# Altium PCB Hope Badge.PcbDoc
Units mm, origin at the board's own origin, x right, y up, seen from the top; angles counter-clockwise.
Board outline 52.39 x 36.16 mm, 2 copper layers (Top Layer, Bottom Layer); 17 components, 9 nets, 34 pads, 6 vias.
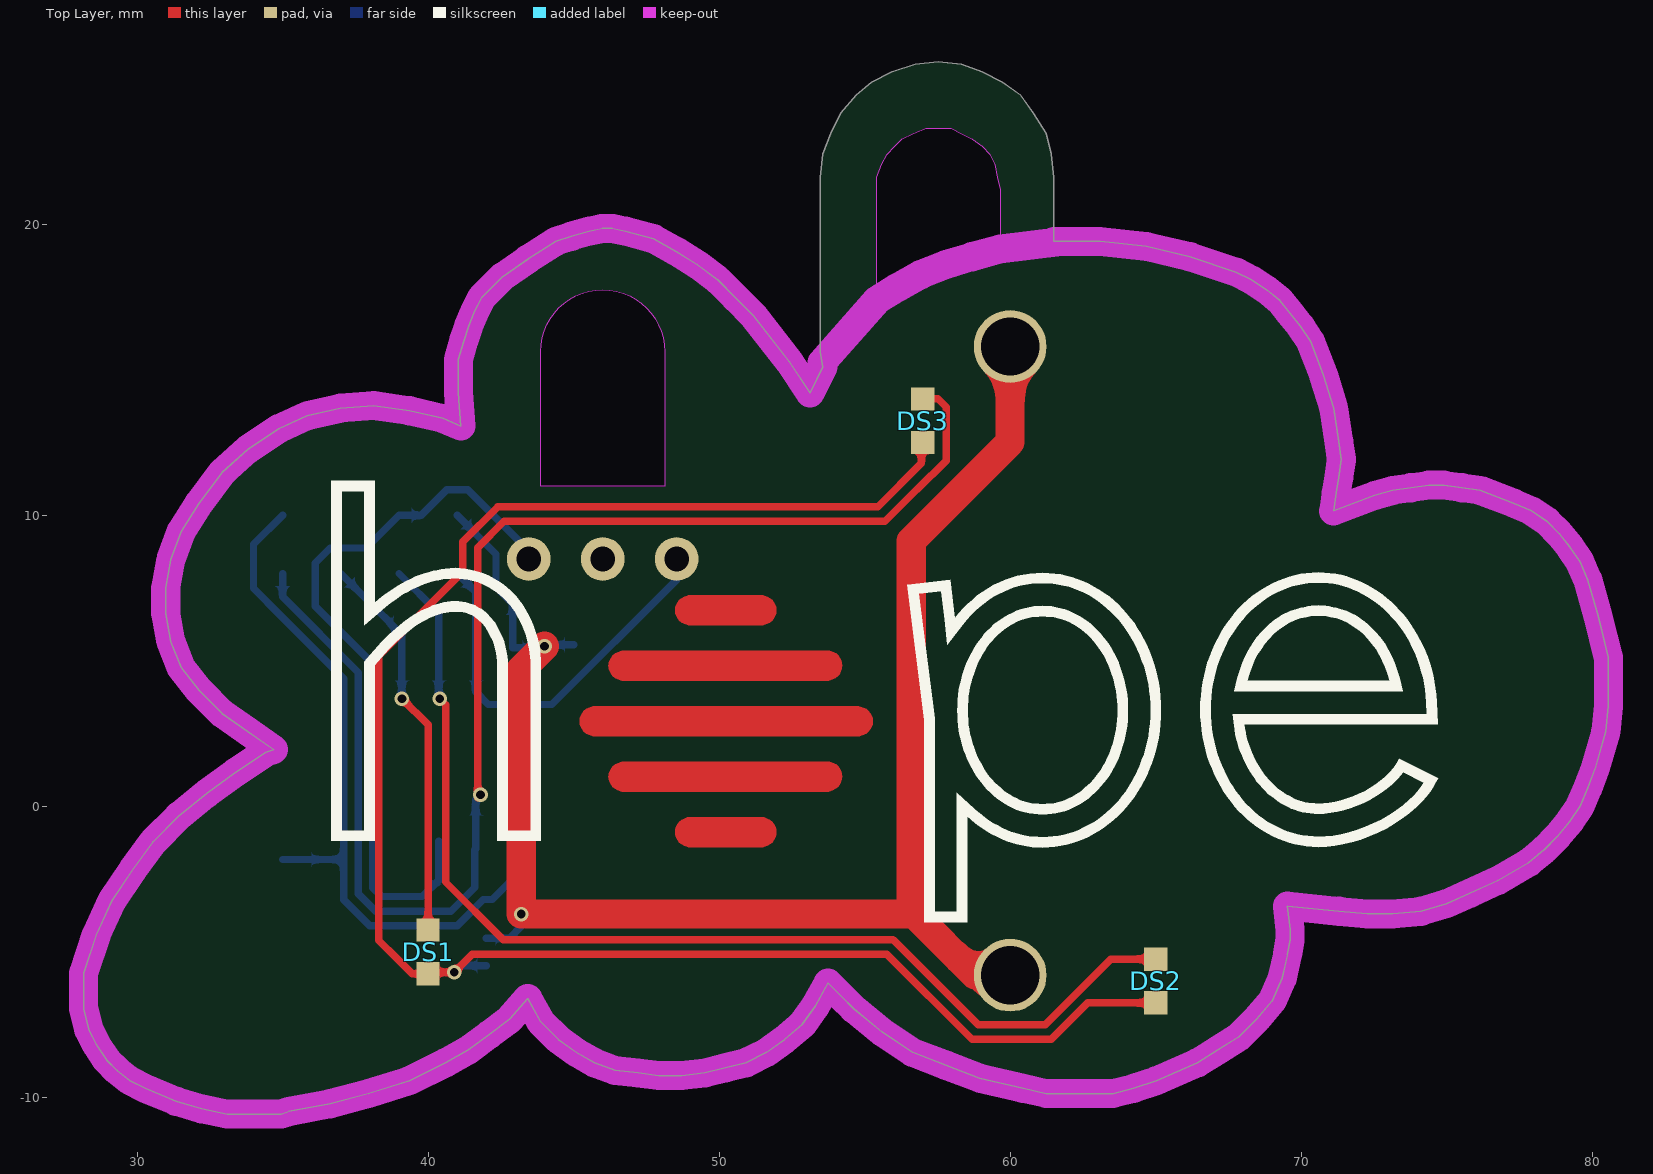
[diagram p0: Top Layer view]
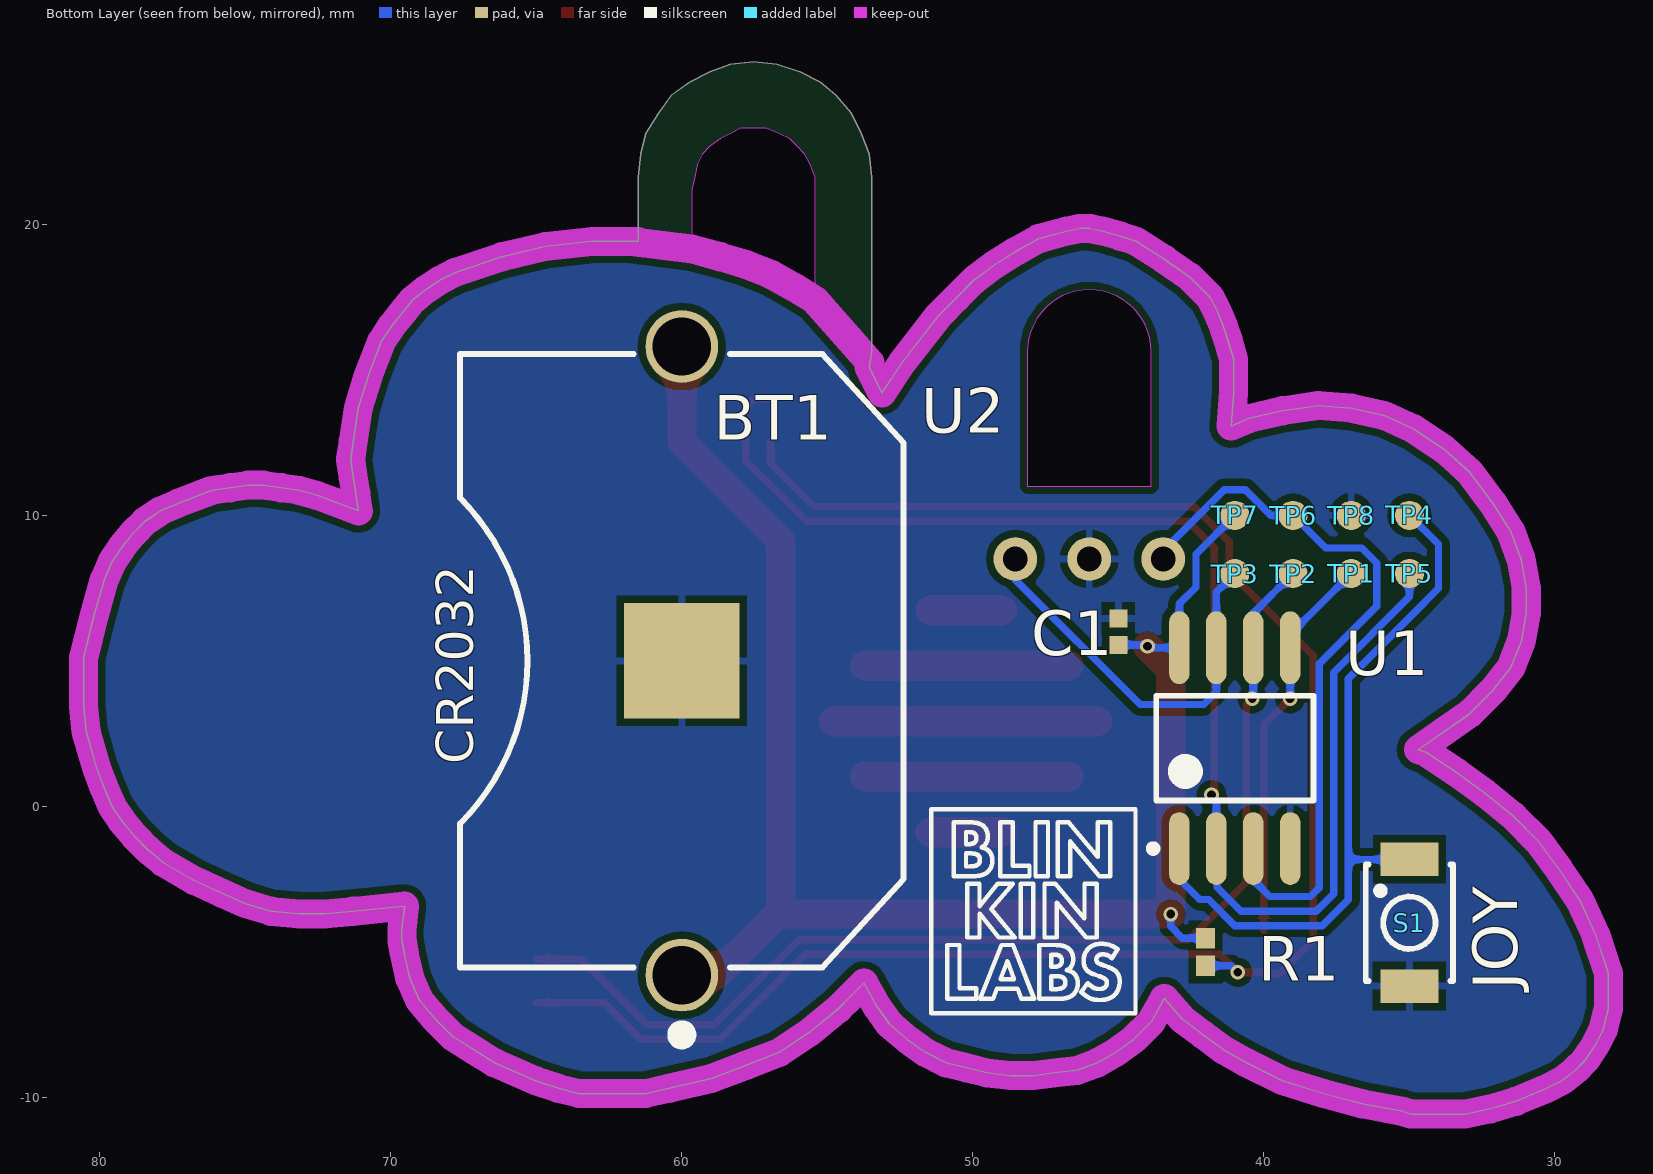
[diagram p1: Bottom Layer view, seen from below]

## Layer stack, top to bottom
Top Solder: solder mask 0.0102, Solder Resist, Dk 3.5
Top Layer: signal copper 0.0356
Dielectric 1: dielectric 0.32, FR-4, Dk 4.8
Bottom Layer: signal copper 0.0356
Bottom Solder: solder mask 0.0102, Solder Resist, Dk 3.5

## Board outline
29.312,-9.072 28.959,-8.72 28.606,-8.191 28.342,-7.661 28.165,-6.956 28.165,-5.721 28.606,-4.398 29.135,-3.252 29.841,-2.193 30.547,-1.223 31.428,-0.341 32.399,0.453 33.369,1.158 34.427,1.864 34.692,1.952 33.81,2.569 32.928,3.187 32.134,3.98 31.517,4.774 31.164,5.656 30.987,6.626 30.987,7.508 31.164,8.478 31.517,9.448 32.134,10.418 32.928,11.477 33.81,12.271 34.868,12.976 35.838,13.417 36.985,13.682 38.131,13.77 39.366,13.593 40.512,13.329 41.13,13.064 41.042,14.211 41.042,15.357 41.218,15.975 41.394,16.504 41.571,16.945 41.835,17.474 42.188,17.827 42.541,18.18 43.423,18.797 44.393,19.414 44.922,19.591 45.54,19.767 45.981,19.855 46.333,19.855 46.774,19.767 47.744,19.503 48.538,19.062 49.244,18.621 49.949,18.091 50.567,17.474 51.184,16.857 52.419,15.269 53.124,14.211 53.565,15.093 53.477,15.622 53.477,21.619 53.565,22.413 53.83,23.118 54.183,23.824 54.712,24.441 55.241,24.882 55.947,25.235 56.74,25.5 57.534,25.588 58.328,25.5 59.033,25.235 59.739,24.882 60.356,24.441 60.797,23.824 61.238,23.118 61.415,22.413 61.503,21.619 61.503,19.414 63.09,19.414 64.678,19.238 66.177,18.885 67.765,18.356 68.294,18.091 68.823,17.739 69.264,17.386 69.617,16.945 69.969,16.504 70.322,15.975 70.763,14.828 71.116,13.682 71.292,12.535 71.381,11.918 71.292,11.3 71.204,10.771 71.116,10.154 72.527,10.683 73.144,10.859 73.762,10.948 74.379,11.036 74.908,11.036 75.526,10.948 76.143,10.859 77.29,10.418 77.907,10.154 78.436,9.801 78.877,9.36 79.23,8.919 79.583,8.39 79.847,7.773 80.2,6.538 80.553,5.127 80.553,3.451 80.465,2.569 80.112,1.334 79.847,0.629 79.583,0.012 79.23,-0.518 78.789,-1.047 78.348,-1.488 77.819,-1.929 76.76,-2.546 75.79,-2.987 74.997,-3.34 74.115,-3.604 73.144,-3.693 72.262,-3.693 71.292,-3.604 69.528,-3.428 69.617,-4.222 69.617,-4.575 69.528,-5.104 69.352,-5.897 68.999,-6.691 68.47,-7.309 67.853,-7.926 67.147,-8.367 66.442,-8.808 65.031,-9.425 64.237,-9.69 63.531,-9.866 61.238,-9.866 60.444,-9.69 58.945,-9.337 57.799,-8.896 56.652,-8.455 55.594,-7.75 54.624,-6.956 54.183,-6.515 53.742,-6.074 53.301,-6.868 52.86,-7.485 52.242,-8.014 51.625,-8.455 50.919,-8.808 50.214,-8.984 49.508,-9.161 48.715,-9.249 47.921,-9.249 47.215,-9.161 46.422,-9.072 45.716,-8.808 45.099,-8.455 44.481,-8.014 43.864,-7.397 43.423,-6.603 42.806,-7.309 42.1,-7.838 41.394,-8.367 40.601,-8.808 39.366,-9.425 37.955,-9.866 36.632,-10.219 35.221,-10.484 34.956,-10.572 33.104,-10.572 32.222,-10.395 31.34,-10.131 30.282,-9.69 29.753,-9.425
cut-out: 55.417,17.386 55.417,21.619 55.594,22.06 55.77,22.413 56.035,22.678 56.299,22.942 56.652,23.118 57.093,23.295 57.975,23.295 58.328,23.118 58.681,22.942 59.033,22.678 59.298,22.413 59.474,22.06 59.562,21.619 59.651,21.178 59.651,19.15 58.681,18.885 57.799,18.621 56.917,18.268 56.123,17.827

## Design rules (kind name [scope] priority, off if disabled: settings)
Clearance [All] p1: gap=0.25 ignorepadtopadclearanceinfootprint=FALSE
PolygonConnect [All] p1: connectstyle=Relief reliefconductorwidth=0.254 reliefentries=4 polygonreliefangle="90 Angle" airgapwidth=0.254
RoutingVias [All] p1: holewidth=0.3 width=0.5 viastyle="Through Hole" minholewidth=0.3 minwidth=0.5 maxholewidth=0.711 maxwidth=1.27
SilkToSolderMaskClearance [IsPad] p1: minsilkscreentomaskgap=0.25 clearancetoexposedcopper=TRUE
SolderMaskExpansion SolderMaskExpansion_Vias [IsVia] p1: expansion=-9
SolderMaskExpansion [All] p2: expansion=0.102
Width [All] p1: maxlimit=1 minlimit=0.254 preferedwidth=0.254 minimp=50.000000 maximp=50.000000 favimp=50.000000
29 further rules are at their usual default settings.

## Components (designator, comment, footprint, x,y, rotation, side; value= is the part's Value field where it differs from the comment)
BT1 "BK-913-TR" MPD-BK-913-3_V 60,5 r90 bottom locked
C1 "CAP 100nF 6.3V 0402(1005)" CAPC0402(1005)60_N 45,6 r270 bottom value=100nF
DS1 "LTW-C191TS5" LTST-LTW-C191TS5_V 40,-5 r90 top
DS2 "LTW-C191TS5" LTST-LTW-C191TS5_V 65,-6 r90 top
DS3 "LTW-C191TS5" LTST-LTW-C191TS5_V 57,13.25 r90 top
R1 "RC0402JR-0775RL" RESC1005X40X25ML5T10 42,-5 r90 bottom
S1 "JOY" TS-1185 35,-4 r270 bottom
TP1 "TP-SM-C-100" TP-SM-C-100 37,8 r180 bottom
TP2 "TP-SM-C-100" TP-SM-C-100 39,8 r90 bottom
TP3 "TP-SM-C-100" TP-SM-C-100 41,8 r90 bottom
TP4 "TP-SM-C-100" TP-SM-C-100 35,10 r90 bottom
TP5 "TP-SM-C-100" TP-SM-C-100 35,8 r90 bottom
TP6 "TP-SM-C-100" TP-SM-C-100 39,10 r90 bottom
TP7 "TP-SM-C-100" TP-SM-C-100 41,10 r90 bottom
TP8 "TP-SM-C-100" TP-SM-C-100 37,10 r90 bottom
U1 "ATtiny85V-10SUR" 8S2_M 41,2 r90 bottom
U2 "UIRM238C" UIRM238C 46,8.5 r180 bottom

## Footprints (in the part's own frame and the unit in brackets; to place one, negate y for a bottom-side part, rotate by r counter-clockwise, add the part's x,y. Pads: shape width x height; smd on the part's side, far side on the other; paste and mask are expansions set on the pad)
8S2_M [mm] "SOP, 8-Leads, Body 5.3x5.3mm, Pitch 1.27mm, IPC Low Density"
  oval 2.5x0.7 smd: 1(-3.45,1.905) 2(-3.45,0.635) 3(-3.45,-0.635) 4(-3.45,-1.905) 5(3.45,-1.905) 6(3.45,-0.635) 7(3.45,0.635) 8(3.45,1.905)
  silkscreen extent -3.57,-2.7 1.8,2.93, body extent -2.7,-2.68 2.7,2.68, height 2.16
CAPC0402(1005)60_N [mm] "Chip Capacitor, Body 1.0x0.5mm, Height 0.6mm, IPC Medium Density"
  rect 0.62x0.62 smd: 1(-0.45,0) 2(0.45,0)
  body extent -0.55,-0.3 0.55,0.3, height 0.6
LTST-LTW-C191TS5_V [mm] "SMD, 2-Leads, Body 1.6x0.8mm"
  rect 0.8x0.8 smd: 1(-0.75,0) 2(0.75,0)
  body extent -0.8,-0.4 0.8,0.4, height 0.65
MPD-BK-913-3_V [mm] "THT, 3-Leads, Body 21.08x15.24mm, Height 4.27mm"
  round 2.5 hole 2: 1(-10.8,0) 2(10.8,0)
  rect 3.96x3.96 smd: 3(0,0)
  silkscreen extent -13.1,-7.62 10.54,7.62, body extent -10.54,-10 10.55,10, height 4.27
RESC1005X40X25ML5T10 [mm] "Chip Resistor, 2-Leads, Body 1.05x0.55mm, IPC Low Density"
  rect 0.7x0.65 smd: 1(-0.475,0) 2(0.475,0)
  body extent -0.53,-0.28 0.53,0.28, height 0.4
TP-SM-C-100 [mm] "Test Point, Surface Mounting, Circular, Pad Diameter 1mm"
  round 1 smd: 1(0,0)
TS-1185 [mm] "3x4x2mm Tact Switch, no alignment pin"
  rect 1.15x2 smd: 1(-2.175,0) 2(2.175,0)
  silkscreen extent -2,-1.5 2,1.5, body extent -2,-1.5 2,1.5, height 2
UIRM238C [mm] "Infrared Receiver Module"
  round 1.5 hole 0.85: 1(-2.54,0) 2(0,0) 3(2.54,0)
  Keep-Out Layer board cut-out: -2.125,2.5 2.125,2.5 2.125,7.125 1.963,7.938 1.503,8.628 0.813,9.088 0,9.25 0,9.25 0,9.25 -0.813,9.088 -1.503,8.628 -1.963,7.938 -2.125,7.125 -2.125,7.125
  body extent -2.75,2.75 2.75,9.75, height 3

## Part data
BT1: library part CMP-0460-00001-1, "Battery Retainer for 20 mm Dia. Batteries, RoHS, Bag", Manufacturer="Memory Protection Devices", Battery Series=2032, Battery Type, Function="Coin Cell, Retainer", Category="Battery Products", ComponentLink1Description="Manufacturer URL", ComponentLink1URL=http://www.memoryprotectiondevices.com/, ComponentLink2Description=Datasheet, ComponentLink2URL=http://www.memoryprotectiondevices.com/datasheets/BK-913-datasheet.pdf, ComponentLink3Description="Package Specification", ComponentLink3URL=http://www.memoryprotectiondevices.com/datasheets/BK-913-datasheet.pdf, DatasheetVersion=May-10, Family="Battery Holders, Clips, Contacts", Mounting Technology="Through Hole", Number of Cells=1, PackageDescription="3-Pin Through Hole Retainer, Body 21.08 x 15.24 mm, Height 4.27 mm", PackageReference=BK-913-3, PackageVersion=May-10, Packing=Bag, PartNumber=BK-913-TR, RoHS=TRUE
C1: library part CMP-1034-02063-1, "CAP 100nF 6.3V -20% to +80% 0402 (1005 Metric) Thickness 0.6mm SMD", Case-EIA=0402, Case-Metric=1005, Rated Voltage="6.3 V", Tolerance="-20% to +80%", Max Thickness="0.6 mm", Technology=SMT
DS1 DS2 DS3: library part CMP-1674-00013-1, "LED Uni-Color White, 70 mW, 20 mA, -20 to 80 degC, 2-Pin SMD, RoHS, Tape and Reel", Case\Package=0603, Case Code (Metric)=1608, Max Operating Temperature="155 degC", Min Operating Temperature="-55 degC", Package Quantity=5000, Power Rating="100 mW", Resistance="12 Ohm", Tolerance=1%, Voltage Rating="50 V", Case Code (Imperial)=0603, ComponentLink1Description="Manufacturer URL", ComponentLink1URL=http://www.us.liteon.com/, ComponentLink2Description=Datasheet, ComponentLink2URL=http://optoelectronics.liteon.com/upload/download/DS22-2004-201/S_110_LTW-C191TS5.pdf, DatasheetVersion="Rev. B, 06/2010", Height="0.45 mm", Length="1.6 mm", Mount="Surface Mount", PackageDescription="2-Pin Surface Mount Device, Body 1.6 x 0.8 mm", PackageReference=LTW-C191TS5, Packaging="Tape and Reel", Pins=2, REACH SVHC="No SVHC", RoHSCompliant=true, Voltage Rating (DC)="50 V", Width="0.8 mm"
R1: library part CMP-2002-08044-2, "Chip Resistor, 75 Ohm, +/- 5%, 0.063 W, -55 to 155 degC, 0402 (1005 Metric), RoHS, Tape and Reel", Case/Package=0402, Case Code (Metric)=1005, Max Operating Temperature="155 degC", Min Operating Temperature="-55 degC", Package Quantity=200, Power Rating="62.5 mW", Resistance="75 Ohm", Tolerance=5%, Voltage Rating="50 V", Case Code (Imperial)=0402, ComponentLink1Description="Manufacturer URL", ComponentLink1URL=http://www.yageo.com/, ComponentLink2Description=Datasheet, ComponentLink2URL=http://www.yageo.com/documents/recent/PYu-RC_Group_51_RoHS_L_04.pdf, DatasheetVersion="Rev. 4, 02/2016", Height="0.35 mm", Length="1 mm", Mount="Surface Mount", Mounting Technology="Surface Mount", PackageDescription="2-Pin Surface Mount Device, Body 1 x 0.5 mm", Packaging="Tape and Reel", PartNumber=RC0402JR-0775RL, Radiation Hardening=No, REACH SVHC="No SVHC", RoHSCompliant=true, Width="0.5 mm"
S1: library part TS-1185, "Tact Switch, 3x4mm, no alignment pin, turtle style"
TP1 TP2 TP3 TP4 TP5 TP6 TP7 TP8: library part CMP-0484-00002-2, "Test Point, Surface Mount, Circular, Pad Diameter 1 mm", Manufacturer="No Vendor", PartNumber=TP-SM-C-100
U1: library part CMP-0093-00335-1, "8-bit AVR Microcontroller, 10MHz, 1.8-5.5V, 8K Flash, 512 Bytes EEPROM, 512 Bytes SRAM, Industrial Grade (-40°C to 85°C), 8-Lead SOIC, Pb-Free, Reel", ComponentLink1Description="Manufacturer URL", ComponentLink1URL=http://www.atmel.com/, ComponentLink2Description="ATtiny25/45/85 Datasheet", ComponentLink2URL=http://www.atmel.com/dyn/resources/prod_documents/doc2586.pdf, ComponentLink3Description="ATtiny25/45/85 Summary", ComponentLink3URL=http://www.atmel.com/dyn/resources/prod_documents/2586S.pdf, DatasheetVersion="revN, Apr-2011", PackageReference=8S2, PackageVersion="revF, Apr-2008"
U2: "Infrared Receiver Module"

## Via types
v1: diameter 0.5, hole 0.3, Top Layer to Bottom Layer, 6 vias

## Nets (pads, with @x,y where several pads share a name; then routed paths per layer and width w, separated by ;. In a path a pad name is that pad's centre, name@x,y a point inside that pad or via, vN(x,y) a via of type N, cw(c..) or ccw(c..) an arc to the next point about the centre after c; other vN are vias at no path point)
GND: BT1.3 C1.1 S1.2 TP8.1 U1.4 U2.2
ICSP_MISO: DS2.2 TP2.1 U1.6 | length 38.6
  Top Layer w0.254: v1(40.4,3.7) 40.6,3.5 40.6,-2.6 42.577,-4.577 55.971,-4.577 55.994,-4.6 56,-4.6 58.9,-7.5 61.2,-7.5 63.45,-5.25 DS2.2
  Bottom Layer w0.254: TP2.1 40.365,6.635 U1.6 40.365,3.735 v1(40.4,3.7)
ICSP_MOSI: DS1.2 TP1.1 U1.5 | length 13.5
  Top Layer w0.254: v1(39.1,3.7) 40,2.8 DS1.2
  Bottom Layer w0.254: TP1.1 39.095,5.905 U1.5 39.095,3.705 v1(39.1,3.7)
ICSP_RESET: S1.1 TP4.1 U1.1 | length 24.9
  Bottom Layer w0.254: S1.1 37.096,-1.825 ; TP4.1 34,9 34,7.5 34.496,7.004 34.496,6.991 37.096,4.391 37.096,-1.825 ; U1.1 42.905,-2.495 42.2,-3.2 41.9,-3.2 40.996,-4.104 37.991,-4.104 37.096,-3.209 37.096,-1.825
ICSP_SCK: TP3.1 U1.7 U2.1 | length 13.4
  Bottom Layer w0.254: TP3.1 41.635,7.365 U1.7 41.635,3.938 42.073,3.5 44.25,3.5 48.54,7.79 U2.1@48.54,8
IR_DATA: TP6.1 U1.3 U2.3 | length 26
  Bottom Layer w0.254: U1.3@40.365,-1.2 U1.3 40.365,-2.535 39.804,-3.096 38.409,-3.096 38.104,-2.791 38.104,4.896 36.123,6.877 36.123,8.363 36.637,8.877 37.877,8.877 TP6.1 39.76,10 40.637,10.877 41.363,10.877 43.46,8.78 U2.3 U2.3@43.46,8
LED_3: DS3.2 TP5.1 U1.2 | length 48.8
  Top Layer w0.254: v1(41.8,0.4) 41.7,0.3 41.7,8.887 42.609,9.796 55.669,9.796 55.673,9.8 55.7,9.8 56.8,10.9 ; 56.81,10.89 57.8,11.88 57.8,13.72 57.52,14 DS3.2
  Bottom Layer w0.254: TP5.1 35,7.2 37.6,4.6 37.6,-3 38.2,-3.6 40.787,-3.6 41.6,-2.787 41.6,-1.485 U1.2 41.635,0.235 v1(41.8,0.4)
LED_HS: DS1.1 DS2.1 DS3.1 R1.1 | length 62.9
  Top Layer w0.254: DS3.1 56.95,12.45 56.95,11.79 55.46,10.3 42.4,10.3 41.196,9.096 41.196,8.066 38.31,5.18 38.31,-4.61 38.9,-5.2 39.45,-5.75 DS1.1 40.05,-5.7 v1(40.9,-5.7) 41.519,-5.081 55.763,-5.081 58.69,-8.008 61.41,-8.008 62.668,-6.75 DS2.1
  Bottom Layer w0.254: v1(40.9,-5.7) 41.125,-5.475 R1.1
VBAT: BT1.1 BT1.2 C1.2 R1.2 TP7.1 U1.8 | length 57.4
  Top Layer w1: v1(44,5.5) 43.2,4.7 v1(43.2,-3.7) 56.7,-3.7 ; BT1.1 58.8,-5.8 56.7,-3.7 ; BT1.2 60,12.52 56.6,9.12 56.6,-3.6 56.7,-3.7
  Bottom Layer w0.254: TP7.1 42.333,8.667 42.333,7.533 42.905,6.961 U1.8 43.95,5.45 v1(44,5.5) 44.05,5.55 C1.2 ; R1.2 42.8,-4.525 43.2,-4.125 v1(43.2,-3.7)

## Polygon pours and split planes (outlines as drawn)
GND on Bottom Layer "GND_L02_P002" (solid, remove dead copper, pour order 2): 179 vertices, not listed, extent 28.165,-10.572 80.553,25.588

## Keep-outs
Keep-Out Layer:
  lines w1: 53.539,15.25 55.417,17.386 56.123,17.827 56.917,18.268 57.799,18.621 58.681,18.885 59.651,19.15 61.75,19.414 ; 53.565,15.093 53.124,14.211 52.419,15.269 51.184,16.857 50.567,17.474 49.949,18.091 49.244,18.621 48.538,19.062 47.744,19.503 46.774,19.767 46.333,19.855 45.981,19.855 45.54,19.767 44.922,19.591 44.393,19.414 43.423,18.797 42.541,18.18 42.188,17.827 41.835,17.474 41.571,16.945 41.394,16.504 41.218,15.975 41.042,15.357 41.042,14.828 41.042,14.211 41.13,13.064 40.512,13.329 39.366,13.593 38.131,13.77 36.985,13.682 35.838,13.417 34.868,12.976 33.81,12.271 32.928,11.477 32.134,10.418 31.517,9.448 31.164,8.478 30.987,7.508 30.987,6.626 31.164,5.656 31.517,4.774 32.134,3.98 32.928,3.187 33.81,2.569 34.692,1.952 34.427,1.864 33.369,1.158 32.399,0.453 31.428,-0.341 30.547,-1.223 29.841,-2.193 29.135,-3.252 28.606,-4.398 28.165,-5.721 28.165,-6.956 28.342,-7.661 28.606,-8.191 28.959,-8.72 29.312,-9.072 29.753,-9.425 30.282,-9.69 31.34,-10.131 32.222,-10.395 33.104,-10.572 34.956,-10.572 35.221,-10.484 36.632,-10.219 37.955,-9.866 39.366,-9.425 40.601,-8.808 41.394,-8.367 42.1,-7.838 42.806,-7.309 43.423,-6.603 43.864,-7.397 44.481,-8.014 45.099,-8.455 45.716,-8.808 46.422,-9.072 47.215,-9.161 47.921,-9.249 48.715,-9.249 49.508,-9.161 50.214,-8.984 50.919,-8.808 51.625,-8.455 52.242,-8.014 52.86,-7.485 53.301,-6.868 53.742,-6.074 54.183,-6.515 54.624,-6.956 55.594,-7.75 56.652,-8.455 57.799,-8.896 58.945,-9.337 60.444,-9.69 61.238,-9.866 61.944,-9.866 62.737,-9.866 63.531,-9.866 64.237,-9.69 65.031,-9.425 66.442,-8.808 67.147,-8.367 67.853,-7.926 68.47,-7.309 68.999,-6.691 69.352,-5.897 69.528,-5.104 69.617,-4.575 69.617,-4.222 69.528,-3.428 71.292,-3.604 72.262,-3.693 73.144,-3.693 74.115,-3.604 74.997,-3.34 75.79,-2.987 76.76,-2.546 77.819,-1.929 78.348,-1.488 78.789,-1.047 79.23,-0.518 79.583,0.012 79.847,0.629 80.112,1.334 80.465,2.569 80.553,3.451 80.553,4.333 80.553,5.127 80.2,6.538 79.847,7.773 79.583,8.39 79.23,8.919 78.877,9.36 78.436,9.801 77.907,10.154 77.29,10.418 76.143,10.859 75.526,10.948 74.908,11.036 74.379,11.036 73.762,10.948 73.144,10.859 72.527,10.683 71.116,10.154 71.204,10.771 71.292,11.3 71.381,11.918 71.292,12.535 71.116,13.682 70.763,14.828 70.322,15.975 69.969,16.504 69.617,16.945 69.264,17.386 68.823,17.739 68.294,18.091 67.765,18.356 66.177,18.885 64.678,19.238 63.09,19.414 61.503,19.414

## Other copper
Top Layer:
  region: 48.574,-1.167 48.53,-1.079 48.495,-0.982 48.486,-0.938 48.486,-0.832 48.495,-0.779 48.53,-0.691 48.574,-0.603 48.636,-0.523 48.715,-0.461 48.803,-0.417 48.9,-0.382 48.944,-0.373 51.511,-0.373 51.555,-0.382 51.652,-0.417 51.74,-0.461 51.819,-0.523 51.881,-0.603 51.925,-0.691 51.961,-0.779 51.969,-0.832 51.969,-0.938 51.961,-0.982 51.925,-1.079 51.881,-1.167 51.819,-1.246 51.74,-1.308 51.652,-1.352 51.555,-1.387 51.511,-1.396 48.944,-1.396 48.9,-1.387 48.803,-1.352 48.715,-1.308 48.636,-1.246
  region: 46.29,0.738 46.237,0.826 46.21,0.923 46.201,0.967 46.193,1.02 46.201,1.073 46.21,1.126 46.237,1.214 46.29,1.302 46.351,1.382 46.431,1.444 46.51,1.488 46.607,1.523 46.66,1.532 53.795,1.532 53.848,1.523 53.936,1.488 54.015,1.444 54.086,1.382 54.148,1.302 54.192,1.214 54.218,1.126 54.227,1.02 54.218,0.967 54.218,0.923 54.183,0.826 54.139,0.738 54.068,0.659 53.998,0.597 53.91,0.553 53.813,0.518 53.76,0.509 46.66,0.509 46.607,0.518 46.51,0.553 46.431,0.597 46.351,0.659
  region: 45.355,2.564 45.293,2.643 45.249,2.731 45.214,2.828 45.205,2.872 45.205,2.978 45.214,3.022 45.249,3.119 45.293,3.207 45.355,3.287 45.434,3.349 45.522,3.393 45.619,3.428 45.663,3.437 54.792,3.437 54.853,3.428 54.95,3.393 55.047,3.349 55.127,3.287 55.188,3.207 55.241,3.119 55.277,3.022 55.285,2.978 55.285,2.872 55.277,2.828 55.241,2.731 55.197,2.643 55.127,2.564 55.056,2.502 54.968,2.458 54.871,2.423 54.827,2.414 45.663,2.414 45.619,2.423 45.522,2.458 45.434,2.502
  region: 46.29,4.548 46.237,4.636 46.21,4.733 46.201,4.777 46.193,4.83 46.201,4.883 46.21,4.936 46.237,5.024 46.29,5.112 46.351,5.192 46.431,5.254 46.51,5.298 46.607,5.333 46.66,5.342 53.795,5.342 53.848,5.333 53.936,5.298 54.015,5.254 54.086,5.192 54.148,5.112 54.192,5.024 54.218,4.936 54.227,4.83 54.218,4.777 54.218,4.733 54.183,4.636 54.139,4.548 54.068,4.469 53.998,4.407 53.91,4.363 53.813,4.328 53.76,4.319 46.66,4.319 46.607,4.328 46.51,4.363 46.431,4.407 46.351,4.469
  region: 48.574,6.453 48.53,6.541 48.495,6.638 48.486,6.682 48.486,6.788 48.495,6.841 48.53,6.929 48.574,7.017 48.636,7.097 48.715,7.159 48.803,7.203 48.9,7.238 48.944,7.247 51.511,7.247 51.555,7.238 51.652,7.203 51.74,7.159 51.819,7.097 51.881,7.017 51.925,6.929 51.961,6.841 51.969,6.788 51.969,6.682 51.961,6.638 51.925,6.541 51.881,6.453 51.819,6.374 51.74,6.312 51.652,6.268 51.555,6.233 51.511,6.224 48.944,6.224 48.9,6.233 48.803,6.268 48.715,6.312 48.636,6.374

## Silkscreen, mask and mechanical layers (free items; w line width, h text height)
Top Overlay:
  drawing of 10 lines, arcs and shapes, not listed
Bottom Overlay:
  drawing of 6357 lines, arcs and shapes, not listed
Mechanical 1:
  drawing of 194 lines, arcs and shapes, not listed
Mechanical 23:
  drawing of 1828 lines, arcs and shapes, not listed

## Text inside footprints (layer, text, board x,y; h text height)
BT1: Bottom Overlay "CR2032" at 67.175,1.45 h1.27 r270